# Altium PCB Olivia_LEDProject.PcbDoc
Units mil, origin at the board's own origin, x right, y up, seen from the top; angles counter-clockwise.
Board outline 985 x 1920 mil, 2 copper layers (Top Layer, Bottom Layer); 7 components, 5 nets, 46 pads, 0 vias.
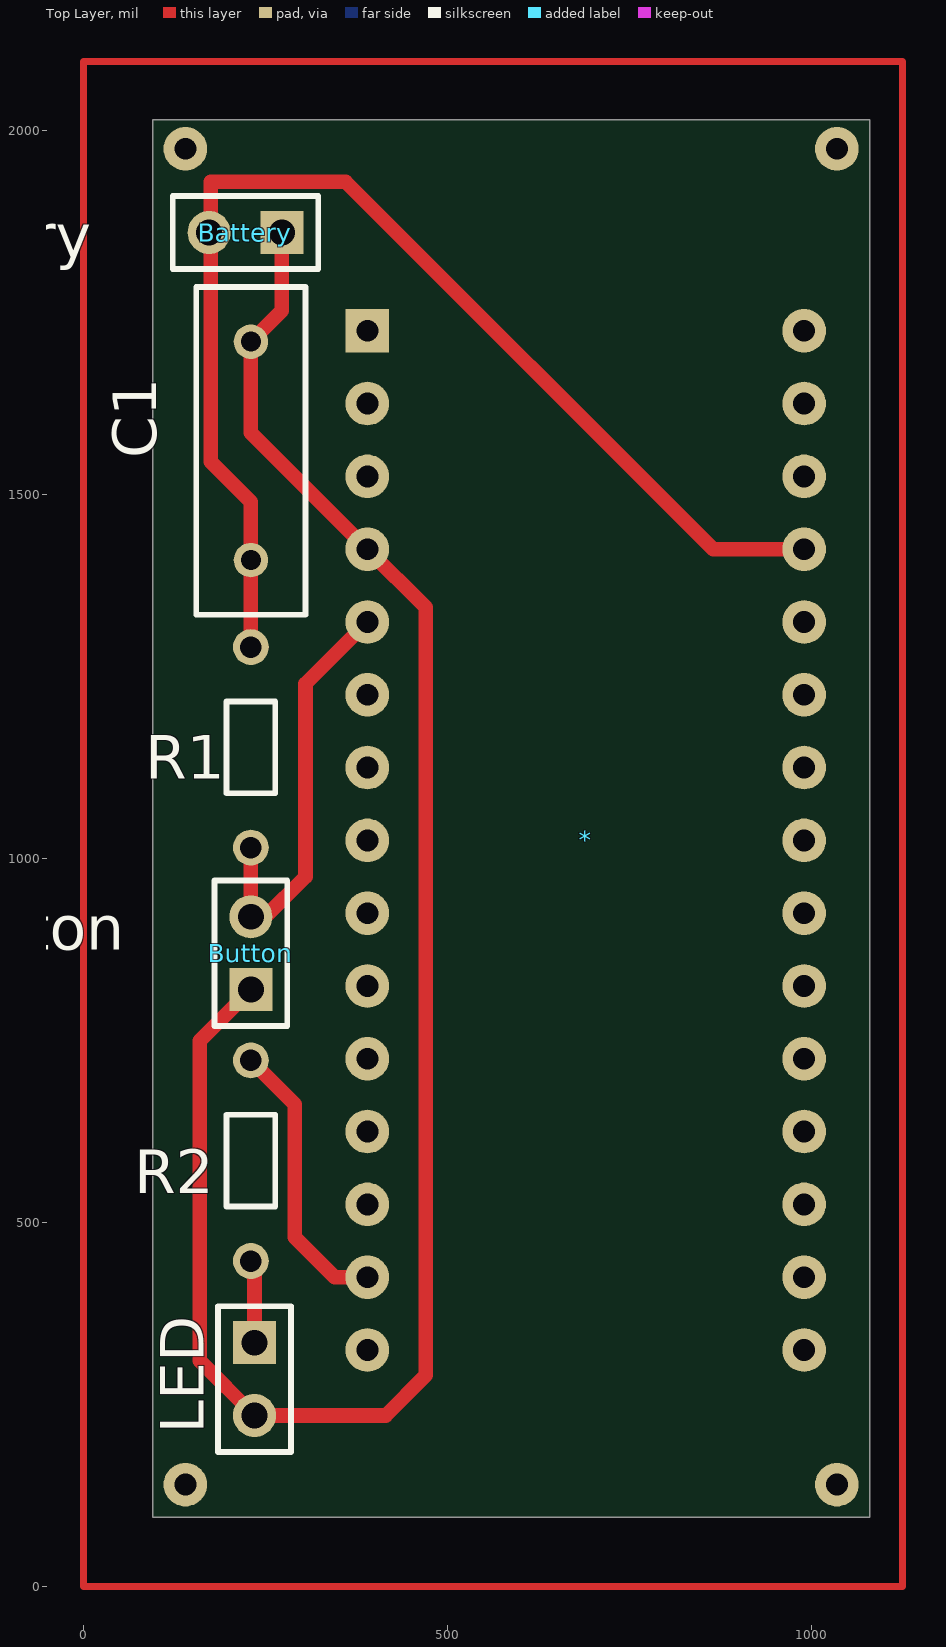
[diagram p0: Top Layer view]
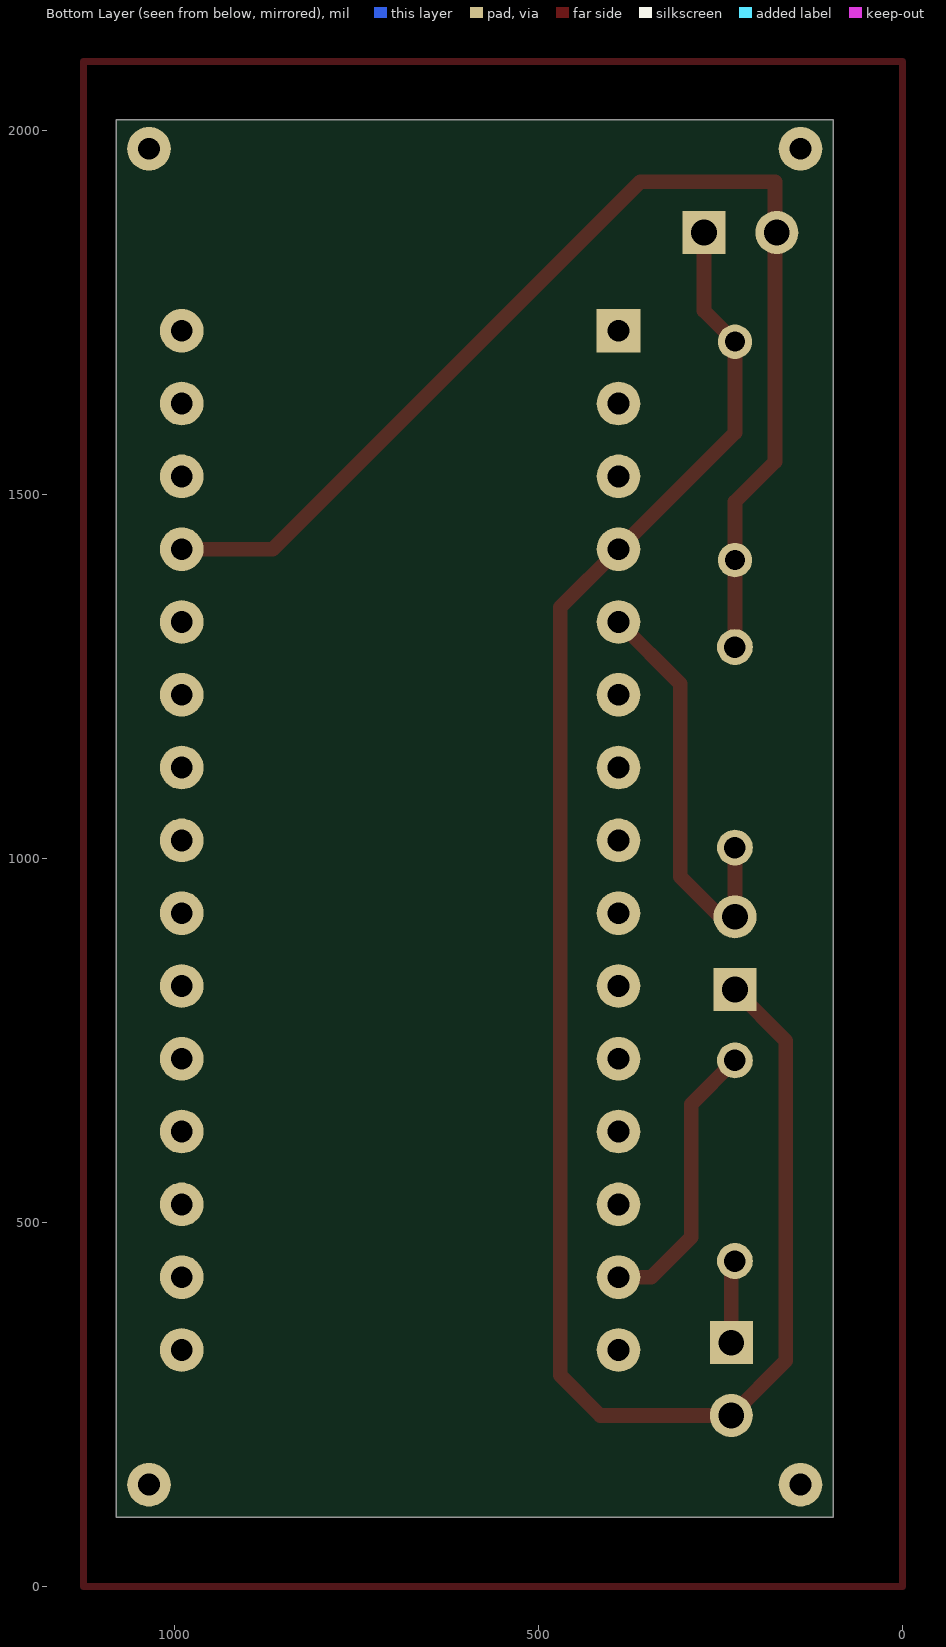
[diagram p1: Bottom Layer view, seen from below]

## Layer stack, top to bottom
Top Solder: solder mask 0.4, Solder Resist, Dk 3.5
Top Layer: signal copper 1.4
Dielectric 1: dielectric 12.6, FR-4, Dk 4.8
Bottom Layer: signal copper 1.4
Bottom Solder: solder mask 0.4, Solder Resist, Dk 3.5

## Board outline
95,95 95,2015 1080,2015 1080,95

## Design rules (kind name [scope] priority, off if disabled: settings)
Clearance [All] p1: gap=10 ignorepadtopadclearanceinfootprint=FALSE except(0: Arc-Hole Track-Hole SMDPad-Hole THPad-Hole Via-Hole Fill-Hole Poly-Hole Region-Hole Text-Hole)
PolygonConnect [All] p1: connectstyle=Relief reliefconductorwidth=10 reliefentries=4 polygonreliefangle="90 Angle" airgapwidth=10
RoutingVias [All] p1: holewidth=28 width=50 viastyle="Through Hole" minholewidth=28 minwidth=50 maxholewidth=28 maxwidth=50
SolderMaskExpansion [All] p1: expansion=4
Width [All] p1: maxlimit=20 minlimit=10 preferedwidth=15 minimp=50.000000 maximp=50.000000 favimp=50.000000
30 further rules are at their usual default settings.

## Components (designator, comment, footprint, x,y, rotation, side; value= is the part's Value field where it differs from the comment)
* "arduinoNano" "Arduino nano" 330,1885 r270 top
Battery "9V Battery" HDR1X2 272.57,1860 r180 top
Button "Button" HDR1X2 230,820 r90 top
C1 "Cap" RAD-0.3 230,1560 r90 top value=100pF
LED "LED" HDR1X2 235,335 r270 top
R1 "15 K" YFDZ-MFJRY13-2_M 230,1152.8 r90 top
R2 "1K" YFDZ-MFJRY13-2_M 230,585 r90 top

## Footprints (in the part's own frame and the unit in brackets; to place one, negate y for a bottom-side part, rotate by r counter-clockwise, add the part's x,y. Pads: shape width x height; smd on the part's side, far side on the other; paste and mask are expansions set on the pad)
"Arduino nano" [mil] "arduino nano"
  rect 60x60 hole 30: 0(160,60)
  round 60 hole 30: 1(260,60) 2(360,60) 3(460,60) 4(560,60) 5(660,60) 6(760,60) 7(860,60) 8(960,60) 9(1060,60) 10(1160,60) 11(1260,60) 12(1360,60) 13(1460,60) 14(1560,60) 15(1560,660) 16(1460,660) 17(1360,660) 18(1260,660) 19(1160,660) 20(1060,660) 21(960,660) 22(860,660) 23(760,660) 24(660,660) 25(560,660) 26(460,660) 27(360,660) 28(260,660) 29(160,660)
HDR1X2 [mm] "Connector; Header; 2 Position"
  rect 1.5x1.5 hole 0.9: 1(0,0)
  round 1.5 hole 0.9: 2(2.54,0)
  silkscreen extent -1.27,-1.27 3.81,1.27
RAD-0.3 [mm] "Radial Cap, Thru-Hole; 2 Leads; 0.3 in Pin Spacing"
  round 1.2 hole 0.7: 1(-3.81,0) 2(3.81,0)
  silkscreen extent -5.71,-1.91 5.71,1.91
YFDZ-MFJRY13-2_M [mm] "Through Hole Resistor, 2-Leads, Dia 1.7mm, Body Length 3.2mm, Pin Spacing 7mm, IPC Low Density"
  round 1.25 hole 0.75: 1(-3.5,0) 2(3.5,0)
  silkscreen extent -1.6,-0.85 1.6,0.85, body extent -3.7,-0.85 3.71,0.85, height 1.69

## Part data
Battery Button LED: library part "Header 2", "Header, 2-Pin", LatestRevisionDate=17-Jul-2002, LatestRevisionNote="Re-released for DXP Platform.", Publisher="Altium Limited"
C1: "Capacitor", LatestRevisionDate=17-Jul-2002, LatestRevisionNote="Re-released for DXP Platform.", PackageDescription="Radial Cap, Thru-Hole; 2 Leads; 0.3 in Pin Spacing", PackageReference=RAD-0.3, Published=8-Jun-2000, Publisher="Altium Limited"
R1 R2: library part CMP-0923-00002-1, "Metal Film Fixed Resistor, 51 KOhm +/- 5%, -55 to 155 degC, 2-Pin THD, Dia 1.7 mm, Body Length 3.2 mm, RoHS", Insulation Voltage (Max.) (V)=200, Load Voltage (Max.) (V)=300, Manufacturer="YingFa Electronics", Operating Voltage (Max.) (V)=150, PartNumber=MFJRY13T52051K00, Resistance (Ohm)=51000, Temperature Range="-55 to 155 degC", Accuracy="+/- 5%", ComponentLink1Description="Manufacturer URL", ComponentLink1URL=http://www.szyfdz.net/, ComponentLink2Description=Datasheet, ComponentLink2URL=http://www.szyfdz.net/mojinshuyanghuamodianzu/, Mounting Technology="Through Hole", PackageDescription="2-Pin Through Hole Resistor, Dia 1.7 mm, Body Length 3.2 mm", PackageReference=MFJRY13-2, Pulsed Voltage (Max.) (V)=300, RoHS=TRUE

## Free pads (board coordinates)
  round 60 hole 30: 2(1035,140) 3(140,140) 4(1035,1975) 5(140,1975)

## Nets (pads, with @x,y where several pads share a name; then routed paths per layer and width w, separated by ;. In a path a pad name is that pad's centre, name@x,y a point inside that pad or via, vN(x,y) a via of type N, cw(c..) or ccw(c..) an arc to the next point about the centre after c; other vN are vias at no path point)
GND: *.3 Battery.1 Button.1 C1.2 LED.2 | length 2605.9
  Top Layer w20: Button.1 160,750 160,310 LED.2 415,235 470,290 470,1345 *.3 230,1585 C1.2 272.57,1752.57 272.57,1872.57 Battery.1@275,1875
Net*_4: *.4 Button.2 R1.1 | length 578
  Top Layer w20: R1.1 Button.2 250,920 305,975 305,1240 *.4
Net*_13: *.13 R2.2 | length 390.4
  Top Layer w20: R2.2 290,662.8 290,480 345,425 *.13
Net*_26: *.26 Battery.2 C1.1 R1.2 | length 1700.8
  Top Layer w20: R1.2@244.41,1290.59 R1.2 C1.1 230,1490 175,1545 175,1930 360,1930 865,1425 *.26
NetLED_1: LED.1 R2.1 | length 114.3
  Top Layer w20: R2.1 235,442.2 LED.1
pads on no net: *.0 *.1 *.2 *.5 *.6 *.7 *.8 *.9 *.10 *.11 *.12 *.14 *.15 *.16 *.17 *.18 *.19 *.20 *.21 *.22 *.23 *.24 *.25 *.27 *.28 *.29
copper on no net: | length 6450
  Top Layer w10: 0,0 0,2095 1125,2095 1125,0 0,0 ; 0,0 5,0 0,0